# Altium PCB stm32f103c8t6.PcbDoc
Units mm, origin at the board's own origin, x right, y up, seen from the top; angles counter-clockwise.
Board outline 45 x 45 mm, 2 copper layers (Top Layer, Bottom Layer); 38 components, 26 nets, 183 pads, 48 vias.
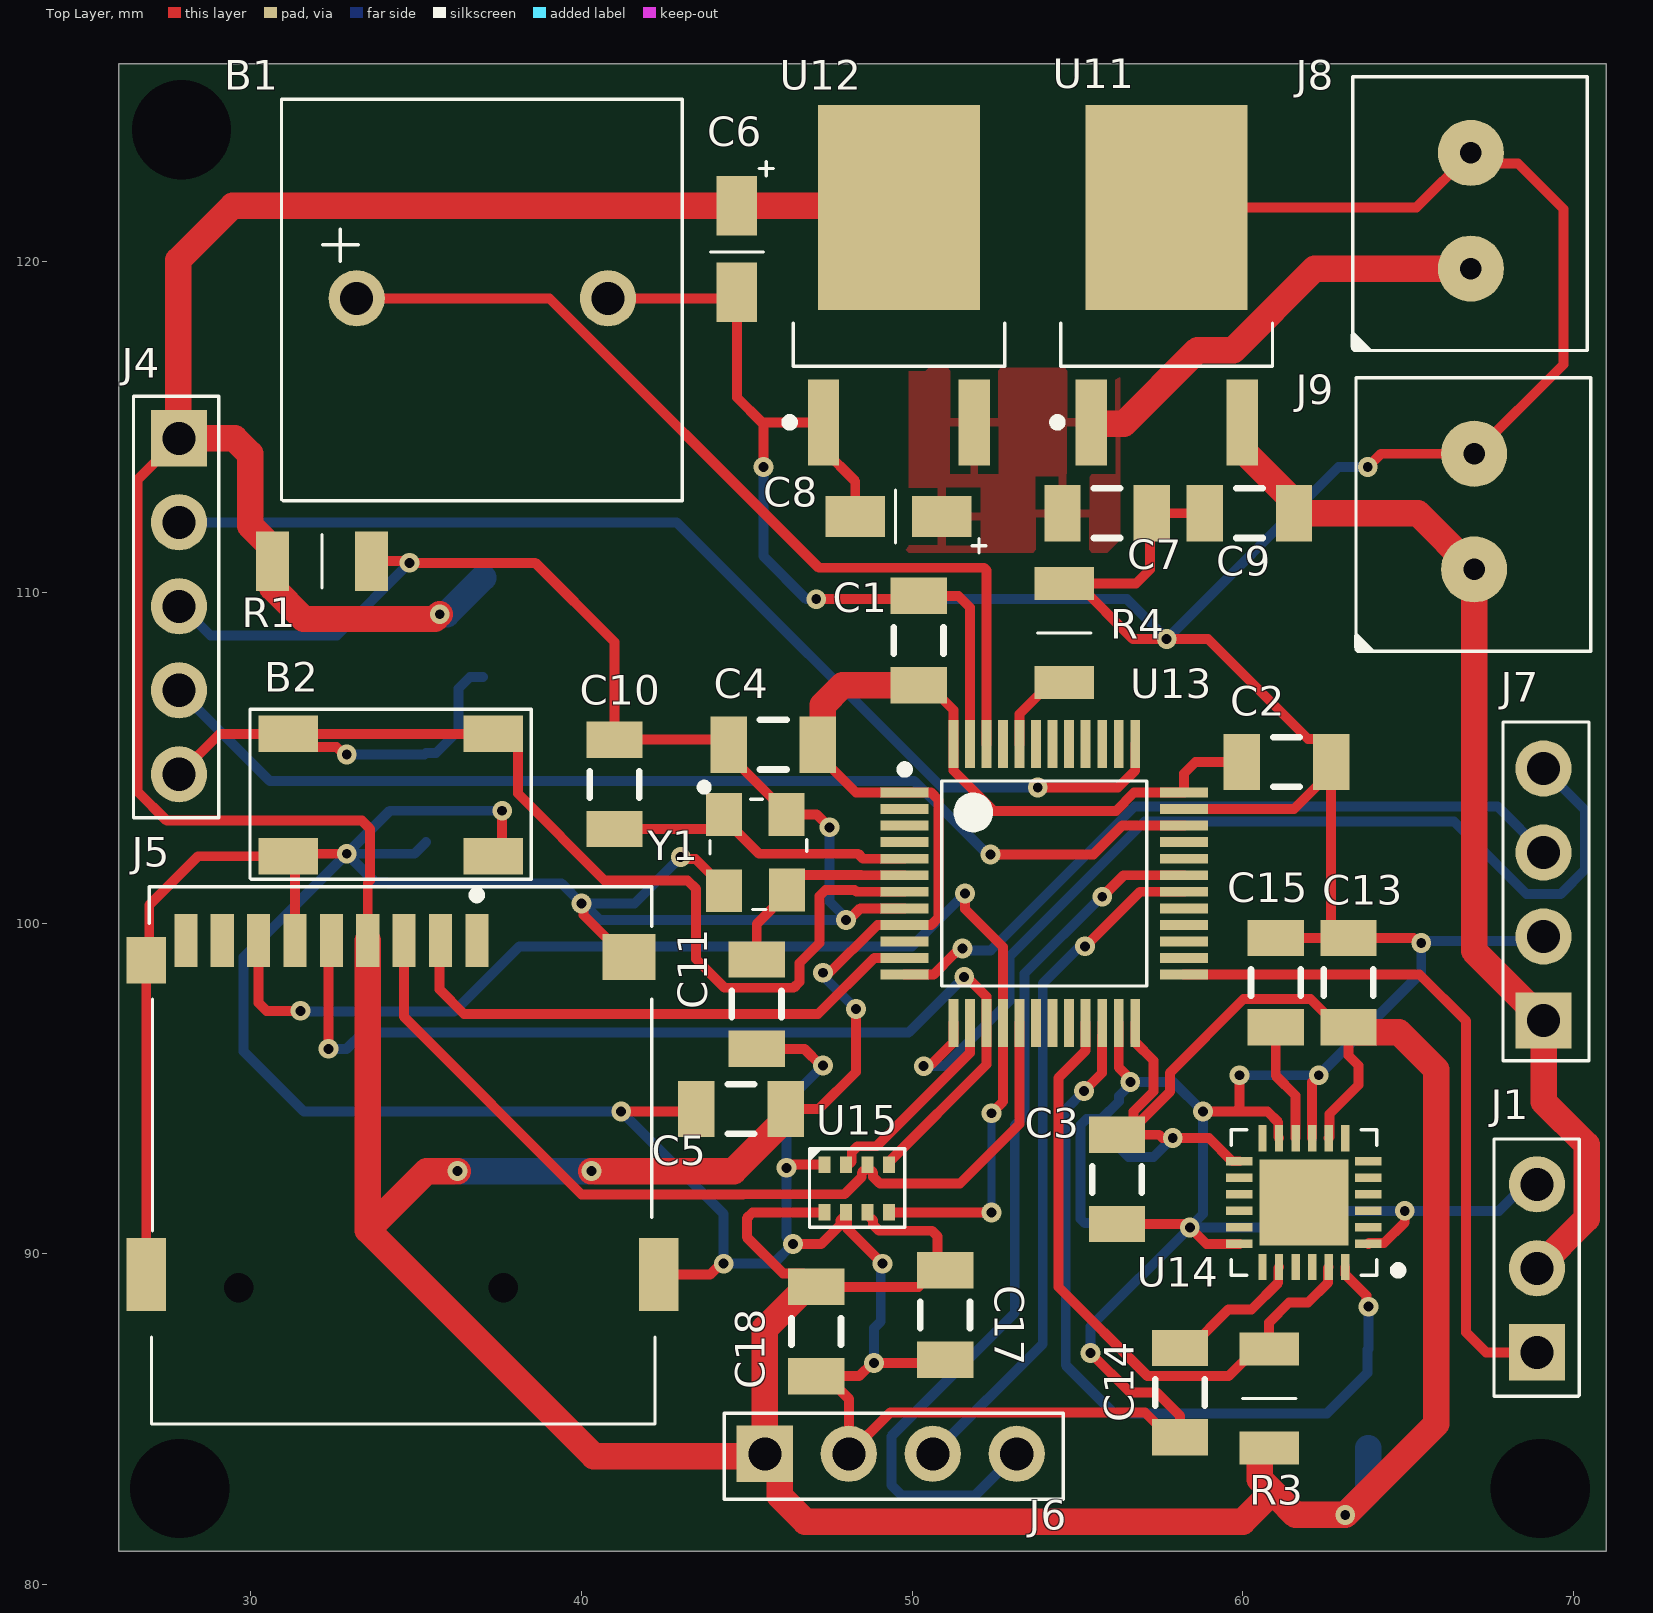
[diagram p0: Top Layer view]
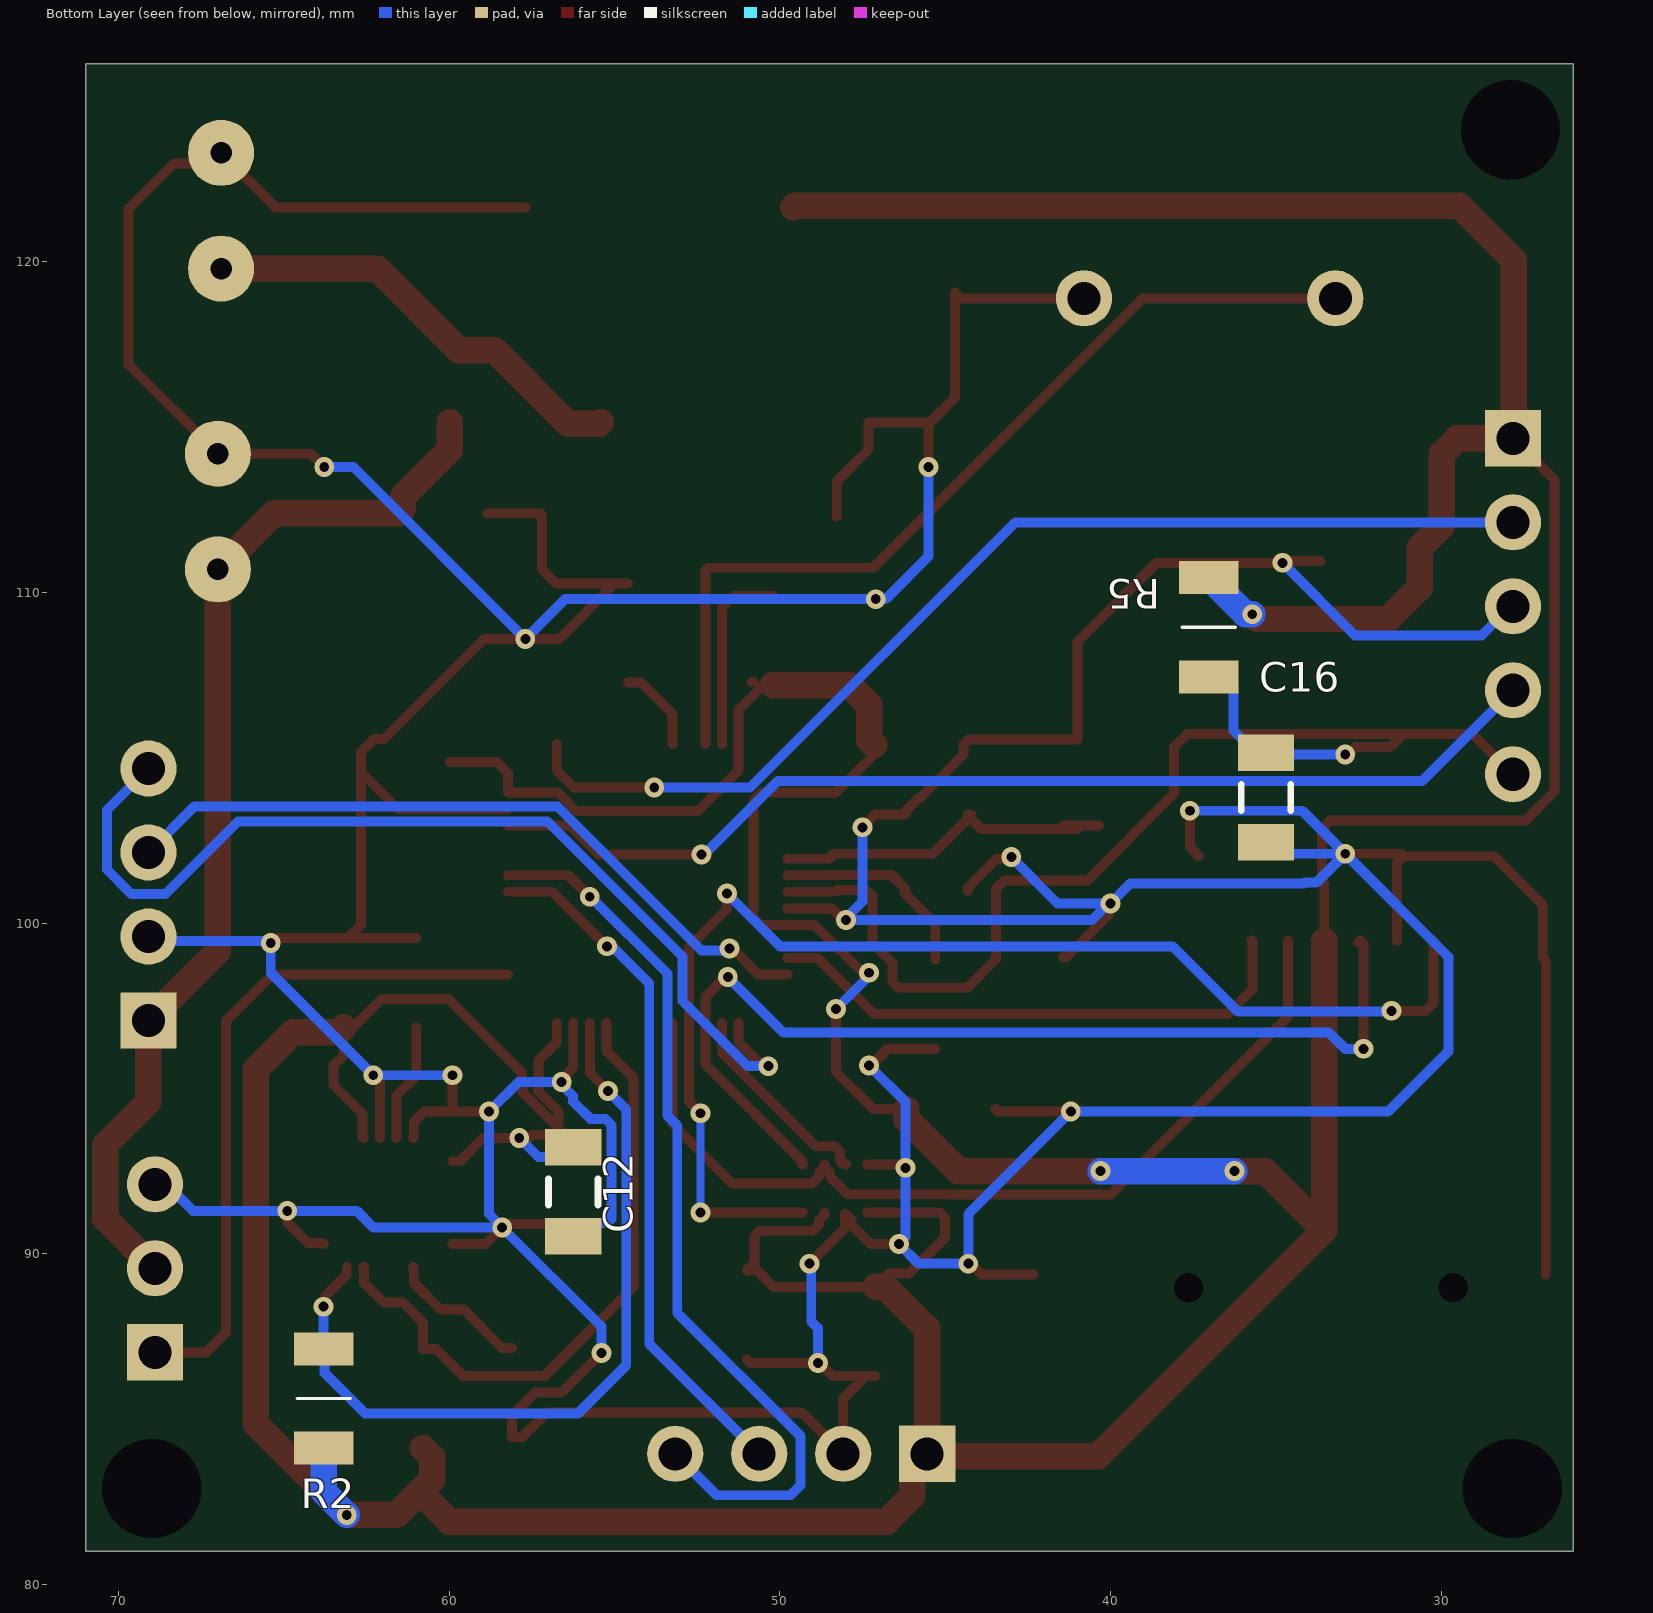
[diagram p1: Bottom Layer view, seen from below]
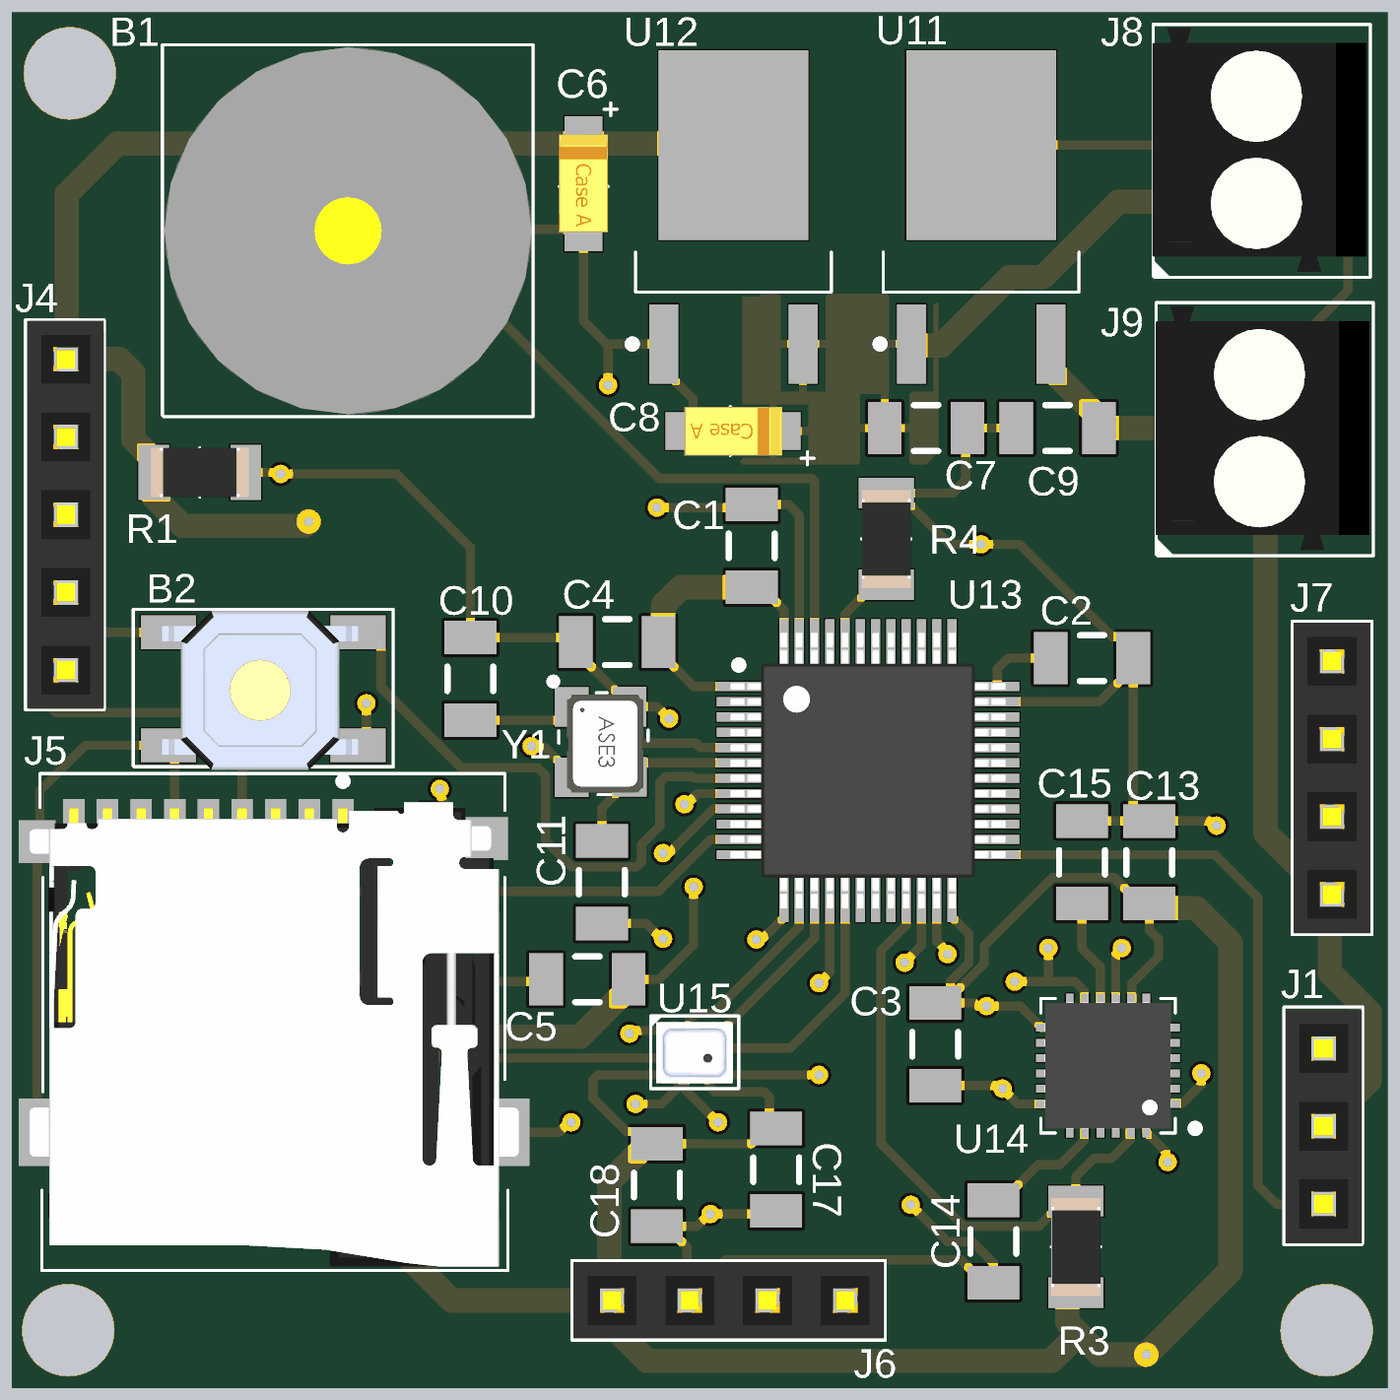
[diagram p2: 3D render of the assembled board from above, using the file's embedded part models]

## Layer stack, top to bottom
Top Solder: solder mask 0.0102, Solder Resist, Dk 3.5
Top Layer: signal copper 0.0356
Dielectric 1: dielectric 0.32, FR-4, Dk 4.8
Bottom Layer: signal copper 0.0356
Bottom Solder: solder mask 0.0102, Solder Resist, Dk 3.5

## Board outline
26,81 26,126 71,126 71,81

## Design rules (kind name [scope] priority, off if disabled: settings)
Clearance [All] p1: gap=0.254 ignorepadtopadclearanceinfootprint=FALSE except(0.152: Arc-Track Arc-SMDPad Arc-Poly Track-Track Track-SMDPad Track-Poly SMDPad-SMDPad SMDPad-THPad SMDPad-Poly THPad-Poly Via-Poly Fill-Poly Poly-Poly)
HoleSize [All] p1: absolutevalues=TRUE maxlimit=3.1 minlimit=0.025 maxpercent=80.000 minpercent=20.000
MinimumSolderMaskSliver [All] p1: minsoldermaskwidth=0.046
PolygonConnect [All] p1: connectstyle=Relief reliefconductorwidth=0.254 reliefentries=4 polygonreliefangle="90 Angle" airgapwidth=0.254
RoutingVias [All] p1: holewidth=0.3 width=0.6 viastyle="Through Hole" minholewidth=0.2 minwidth=0.2 maxholewidth=0.9 maxwidth=1.27
SilkToSolderMaskClearance [IsPad] p1: minsilkscreentomaskgap=0.1 clearancetoexposedcopper=TRUE
SolderMaskExpansion [All] p1: expansion=0.102
UnRoutedNet [All] p1: checkbadconnections=TRUE
Width [All] p1: maxlimit=1 minlimit=0.254 preferedwidth=0.3 minimp=50.000000 maximp=50.000000 favimp=50.000000
26 further rules are at their usual default settings.

## Classes and differential pairs
component class "STM32F PCB KARTI ЮEMATЭРЭ": B1 C2 C3 C4 C5 C6 C7 C8 C9 C10 C11 C12 C13 C14 C15 C16 C17 C18 J1 J4 J6 J7 J8 J9 R1 R2 R3 R4 R5 U11 U12 U13 U14 U15

## Components (designator, comment, footprint, x,y, rotation, side; value= is the part's Value field where it differs from the comment)
B1 "Buzzer 5v" "Buzzer 5v" 33.2,118.9 r0 top
B2 "Push Button" "PUSB BUTTON-SMD" 31.125,105.725 r0 top
C1 "0.1 uF C1206" C1206 50.2,108.55 r90 top
C2 "0.1 uF C1206" C1206 61.325,104.875 r0 top
C3 "0.1 uF C1206" C1206 56.2,92.25 r270 top
C4 "0.1 uF C1206" C1206 45.8,105.4 r180 top
C5 "0.1 uF C1206" C1206 44.825,94.375 r180 top
C6 "10 uF - Tantal" "C1206- TANTAL" 44.7,120.3 r270 top
C7 "330 nF C1206" C1206 55.9,112.4 r0 top
C8 "10 uF - Tantal" "C1206- TANTAL" 49.5,112.3 r180 top
C9 "0.1 uF C1206" C1206 60.2,112.4 r180 top
C10 "16 pF" C1206 41,104.2 r90 top
C11 "16 pF" C1206 45.3,97.55 r270 top
C12 "0.1 uF C1206" C1206 56.25,91.875 r270 bottom
C13 "0.1 uF C1206" C1206 63.2,98.2 r90 top
C14 "2.2 nF c1206" C1206 58.1,85.8 r270 top
C15 "0.1 uF C1206" C1206 61,98.2 r90 top
C16 "0.1 uF C1206" C1206 35.3,103.8 r270 bottom
C17 "0.1 uF C1206" C1206 51,88.15 r270 top
C18 "0.1 uF C1206" C1206 47.1,87.65 r270 top
J1 "Header 2.54 1x3" "Header 2.54 1x3" 68.875,87.02 r90 top
J4 "Header 2.54 1x5" "Header 2.54 1x5" 27.825,114.665 r270 top
J5 "Micro SD Card Holder" "Micro SD Card Holder" 34.15,92.4 r0 top
J6 "Header 2.54 1x4" "Header 2.54 1x4" 46.045,84.675 r0 top
J7 "Header 2.54 1x4" "Header 2.54 1x4" 68.375,97.56 r90 top
J8 "Klemens 1x2 3.5mm" "Klemens 1x2 - 3.5mm" 66.85,121.4 r90 top
J9 "Klemens 1x2 3.5mm" "Klemens 1x2 - 3.5mm" 66.95,112.3 r90 top
R1 "10K R1206" "R1206 Resэstor" 32.225,110.95 r180 top
R2 "4.7K R1206" "R1206 Resэstor" 63.8,85.7 r270 bottom
R3 "4.7K R1206" "R1206 Resэstor" 60.8,85.7 r270 top
R4 "10K R1206" "R1206 Resэstor" 54.6,108.7 r90 top
R5 "10K R1206" "R1206 Resэstor" 37.025,108.875 r90 bottom
U11 "L7805-DPAK" DPAK228P972X230-3N 57.7,119.3 r90 top
U12 "LD108633 DPAK" DPAK228P972X230-3N 49.6,119.3 r90 top
U13 "STM32F101" LQFP48-STM 54,101.2 r0 top
U14 "MPU6050" QFN50P400X400X90_HS-25N 61.85,91.55 r180 top
U15 "BMP280" BMP280 48.325,91.975 r0 top
Y1 "8 MHz 12.5 pf Osc" "8 MHZ Osc." 44.8,102.3 r270 top

## Footprints (in the part's own frame and the unit in brackets; to place one, negate y for a bottom-side part, rotate by r counter-clockwise, add the part's x,y. Pads: shape width x height; smd on the part's side, far side on the other; paste and mask are expansions set on the pad)
"8 MHZ Osc." [mm]
  rect 1.3x1.1 smd mask+0.05: 1(-0.981,-0.49) 2(1.319,-0.49) 3(1.303,1.417) 4(-0.986,1.401)
  silkscreen extent -1.91,-1.19 1.88,2.01, body extent -1.38,-0.64 1.82,1.86, height 1.22
BMP280 [mm]
  rect 0.35x0.5 smd mask+0.05: 1(-0.975,0.725) 2(-0.325,0.725) 3(0.325,0.725) 4(0.975,0.725) 5(0.975,-0.725) 6(0.325,-0.725) 7(-0.325,-0.725) 8(-0.975,-0.725)
  silkscreen extent -1.45,-1.17 1.45,1.2, body extent -1.24,-1 1.26,1, height 0.95
"Buzzer 5v" [mm]
  round 1.7 hole 1 mask+0.05: 1(0,0) 2(7.6,0)
  silkscreen extent -2.27,-6.12 9.85,6.02, body extent -2.2,-6.05 9.8,5.95, height 9.5
C1206 [mm] "Chip Capacitor, Body 3.2x1.6mm, IPC High Density"
  rect 1.1x1.7 smd: 1(-1.35,0) 2(1.35,0)
  silkscreen extent -0.4,-0.75 0.4,0.75, body extent -1.7,-0.9 1.7,0.9, height 1.3
"C1206- TANTAL" [mm]
  rect 1.8x1.23 smd mask+0.05: 1(-1.4,0) 1(-1.4,0) 2(1.22,0)
  silkscreen extent -2.74,-0.8 0,1.1, body extent -1.7,-0.8 1.5,0.8, height 1.62
DPAK228P972X230-3N [mm] "D-PAK, 3-Pads, Body 6,40x6,56mm (max), IPC Medium Density"
  rect 2.6x0.95 smd mask+0.05: 1(-4.15,2.28) 2(-4.15,-2.28)
  rect 6.2x4.9 smd mask+0.05: 3(2.35,0)
  silkscreen extent -4.27,-3.2 -1.15,3.43, body extent -2.5,-3.2 4.1,3.2, height 2.3
"Header 2.54 1x3" [mm]
  rect 1.7x1.7 hole 1 mask+0.05: 1(0,-0.025)
  round 1.7 hole 1 mask+0.05: 2(2.54,-0.025) 3(5.08,-0.025)
  silkscreen extent -1.33,-1.3 6.45,1.28, body extent -1.26,-1.27 6.36,1.23, height 9.1
"Header 2.54 1x4" [mm]
  rect 1.7x1.7 hole 1 mask+0.05: 1(-0.5,-0.725)
  round 1.7 hole 1 mask+0.05: 2(2.04,-0.725) 3(4.58,-0.725) 4(7.12,-0.725)
  silkscreen extent -1.73,-2.1 8.52,0.5, body extent -1.68,-2.05 8.48,0.45, height 9.1
"Header 2.54 1x5" [mm]
  rect 1.7x1.7 hole 1 mask+0.05: 1(0,0)
  round 1.7 hole 1 mask+0.05: 2(2.54,0) 3(5.08,0) 4(7.62,0) 5(10.16,0)
  silkscreen extent -1.28,-1.37 11.48,1.2, body extent -1.25,-1.3 11.45,1.2, height 9.1
"Klemens 1x2 - 3.5mm" [mm]
  round 2 hole 0.65: 1(-1.6,-0.05) 2(1.9,-0.05)
  silkscreen extent -4.11,-3.58 4.2,3.58, body extent -3.9,-3.45 4.09,3.55, height 8.9
LQFP48-STM [mm] "TSQFP, 48-Leads, Body 7,00x7,00mm, Pitch 0,50mm, IPC Medium Density"
  rect 1.45x0.3 smd mask+0.05: 1(-4.225,2.75) 2(-4.225,2.25) 3(-4.225,1.75) 4(-4.225,1.25) 5(-4.225,0.75) 6(-4.225,0.25) 7(-4.225,-0.25) 8(-4.225,-0.75) 9(-4.225,-1.25) 10(-4.225,-1.75) 11(-4.225,-2.25) 12(-4.225,-2.75) 25(4.225,-2.75) 26(4.225,-2.25) 27(4.225,-1.75) 28(4.225,-1.25) 29(4.225,-0.75) 30(4.225,-0.25) 31(4.225,0.25) 32(4.225,0.75) 33(4.225,1.25) 34(4.225,1.75) 35(4.225,2.25) 36(4.225,2.75)
  rect 0.3x1.45 smd mask+0.05: 13(-2.75,-4.225) 14(-2.25,-4.225) 15(-1.75,-4.225) 16(-1.25,-4.225) 17(-0.75,-4.225) 18(-0.25,-4.225) 19(0.25,-4.225) 20(0.75,-4.225) 21(1.25,-4.225) 22(1.75,-4.225) 23(2.25,-4.225) 24(2.75,-4.225) 37(2.75,4.225) 38(2.25,4.225) 39(1.75,4.225) 40(1.25,4.225) 41(0.75,4.225) 42(0.25,4.225) 43(-0.25,4.225) 44(-0.75,4.225) 45(-1.25,4.225) 46(-1.75,4.225) 47(-2.25,4.225) 48(-2.75,4.225)
  silkscreen extent -4.35,-3.1 3.1,3.57, body extent -4.5,-4.5 4.5,4.5, height 1.6
"Micro SD Card Holder" [mm]
  rect 0.7x1.6 smd paste+0 mask+0: 1(2.684,7.075) 2(1.584,7.075) 3(0.484,7.075) 4(-0.616,7.075) 5(-1.716,7.075) 6(-2.816,7.075) 7(-3.916,7.075) 8(-5.016,7.075) Cd(-6.116,7.075)
  rect 1.2x1.4 smd paste+0 mask+0: 10(-7.316,6.475)
  rect 1.6x1.4 smd paste+0 mask+0: 11(7.284,6.575)
  rect 1.2x2.2 smd paste+0 mask+0: 12(-7.316,-3.025) 13(8.184,-3.025)
  round 0 hole 0.9 unplated paste-1000 mask+0: ""(-4.516,-3.425) ""(3.484,-3.425)
  silkscreen extent -7.22,-7.55 8.08,8.7, body extent -7.57,-7.42 8.43,7.83, height 1.85
"PUSB BUTTON-SMD" [mm]
  rect 1.8x1.1 smd mask+0.05: 1(0,0) 2(6.2,0) 3(0,-3.7) 4(6.2,-3.7)
  silkscreen extent -1.15,-4.4 7.35,0.75, body extent -0.2,-4.5 6.2,0.7, height 1.5
QFN50P400X400X90_HS-25N [mm] "QFN, 24-Leads, Body 4,00x4,00mm, Pitch 0,50mm, Thermal Pad 2,70x2,60mm, IPC Medium Density"
  rect 0.8x0.25 smd mask+0.05: 1(-1.95,1.25) 2(-1.95,0.75) 3(-1.95,0.25) 4(-1.95,-0.25) 5(-1.95,-0.75) 6(-1.95,-1.25) 13(1.95,-1.25) 14(1.95,-0.75) 15(1.95,-0.25) 16(1.95,0.25) 17(1.95,0.75) 18(1.95,1.25)
  rect 0.25x0.8 smd mask+0.05: 7(-1.25,-1.95) 8(-0.75,-1.95) 9(-0.25,-1.95) 10(0.25,-1.95) 11(0.75,-1.95) 12(1.25,-1.95) 19(1.25,1.95) 20(0.75,1.95) 21(0.25,1.95) 22(-0.25,1.95) 23(-0.75,1.95) 24(-1.25,1.95)
  rect 2.7x2.6 smd mask+0.05: 25(0,0)
  silkscreen extent -2.98,-2.2 2.2,2.2, body extent -2.07,-2.07 2.07,2.07, height 0.9
"R1206 Resэstor" [mm]
  rect 1x1.8 smd mask+0.05: 1(-1.425,0) 2(1.575,0)
  silkscreen extent 0.08,-0.8 0.08,0.81, body extent -1.52,-0.8 1.68,0.81, height 0.55

## Part data
B2: "Smd Push Button", Satэn Alma Linki=https://urun.n11.com/diger/mini-pushbutton-switch-smd-P227461537?gclid=Cj0KCQjwkoDmBRCcARIsAG3xzl8Y_-jeD7HocNM6lvuZ_rVp83568XPGtNzlPwXWLph8oCRqo0yh87UaApZYEALw_wcB&gclsrc=aw.ds
U11: "L7805 5V REGULATOR. SMD PAKET"
U12: "LD1086 3.3V REGULATOR"
U13: "STM32F101 48 PЭNLЭ MЭKROЭЮLEMCЭ"
U14: "MPU6050 GYRO"
U15: "BMP280 SENSOR"

## Free pads (board coordinates)
  round 0 hole 3: ""(27.85,82.9) ""(27.9,124) ""(69,82.9)

## Via types
v1: diameter 0.6, hole 0.3, Top Layer to Bottom Layer, 48 vias

## Nets (pads, with @x,y where several pads share a name; then routed paths per layer and width w, separated by ;. In a path a pad name is that pad's centre, name@x,y a point inside that pad or via, vN(x,y) a via of type N, cw(c..) or ccw(c..) an arc to the next point about the centre after c; other vN are vias at no path point)
3.3V: C1.1 C2.1 C3.1 C4.1 C5.1 C6.1 C12.1 C13.1 C17.1 C18.1 J4.1 J5.4 J6.1 R1.2 R2.2 R3.2 R5.2 U12.3 U13.1 U13.9 U13.24 U13.36 U13.48 U14.8 U14.13 U15.6 U15.8 | length 221.3
  Top Layer w0.3: J4.1 26.571,113.411 26.571,103.986 27.457,103.1 33.358,103.1 33.604,102.854 33.604,101.293 33.534,101.223 J5.4 ; C5.1 47.175,94.375 48.3,95.5 v1(48.3,97.4) ; C4.1 47.15,105.1 48.3,103.95 U13.1 50.578,103.95 50.802,103.726 50.802,100.175 50.577,99.95 U13.9 48.95,99.95 47.4,98.4 v1(47.3,98.5) ; U15.8 45.176,91.25 45,91.074 45,90.5 46.1,89.4 46.7,89.4 C18.1 48.594,89 48.598,88.996 50.196,88.996 50.7,89.5 C17.1 50.774,89.726 50.774,90.522 50.598,90.698 49,90.698 48.823,90.875 48.823,91.002 48.65,91.175 U15.6 ; C1.1 50.5,107.2 51.15,106.55 51.25,106.45 U13.48 51.25,104.623 52.477,103.396 56.162,103.396 56.716,103.95 U13.36 58.225,104.525 58.575,104.875 C2.1 ; C1.1@50.8,107.3 C1.1@50.85,107.3 ; C3.1 C3.1@56.5,93.6 ; C3.1@56.696,94 56.696,94.3 57.304,94.908 57.304,95.846 56.75,96.4 U13.24 ; U14.13 59.675,92.8 58.975,93.5 v1(57.884,93.5) 57.569,93.5 57.469,93.6 C3.1@56.5,93.6 ; U14.8 62.625,93.525 62.625,94.229 63.504,95.108 63.504,95.692 63.2,95.996 C13.1 62.9,96.85 62.048,97.702 60.025,97.702 57.8,95.477 57.8,94.9 C3.1@56.5,93.6
  Top Layer w0.8: J5.4 33.534,90.716 ; v1(35.713,109.344) 35.569,109.2 31.6,109.2 30.65,110.15 R1.2 30.65,111.35 29.975,112.025 29.975,114.196 29.506,114.665 J4.1 27.8,114.69 27.8,120.05 29.45,121.7 44.7,121.7 49.55,121.7 U12.3 ; v1(36.25,92.5) 35.318,92.5 33.534,90.716 ; v1(40.3,92.5) 44.6,92.5 46.175,94.075 C5.1 ; C18.1 46.8,89 45.545,87.745 J6.1 ; C4.1 47.3,105.55 47.3,106.6 47.9,107.2 C1.1 ; R3.2 60.519,83.844 60.519,83.181 61.059,82.641 ; C13.1 63.35,96.7 64.725,96.7 65.854,95.571 65.854,84.854 v1(63.1,82.1) 61.6,82.1 61.059,82.641 ; 33.534,90.716 40.375,83.875 45.47,83.875 J6.1 ; J6.1 45.995,83.5 45.995,82.674 46.769,81.9 60,81.9 60.741,82.641 61.059,82.641
  Bottom Layer w0.3: v1(47.3,98.5) 47.3,98.4 v1(48.3,97.4) ; C12.1 56.55,92.925 57.299,92.925 57.874,93.5 v1(57.884,93.5)
  Bottom Layer w0.8: v1(35.713,109.344) 35.919,109.344 R5.2 ; v1(36.25,92.5) v1(40.3,92.5) ; v1(63.1,82.1) 63.8,82.8 R2.2
5V: C9.1 J1.2 J7.1 J9.1 U11.2 | length 32.7
  Top Layer w0.8: U11.2 59.98,114.325 61.4,112.905 61.4,112.55 C9.1 65.3,112.4 J9.1 67,99.16 J7.1 69.1,94.6 70.404,93.296 70.404,91.064 J1.2
7.4V: C7.1 C8.1 J8.1 U11.1 U12.2 | length 13.4
  Top Layer w0.8: U11.1 55.47,115.1 56.4,115.1 58.635,117.335 59.716,117.335 62.181,119.8 J8.1
GND: B1.2 B2.3 B2.4 C1.2 C2.2 C3.2 C4.2 C5.2 C6.2 C7.2 C8.2 C9.2 C10.2 C11.2 C12.2 C13.2 C14.2 C15.2 C16.2 C17.2 C18.2 J1.3 J4.3 J5.6 J5.10 J5.11 J5.12 J5.13 J6.2 J7.2 J8.2 J9.2 R1.1 R4.2 U11.3 U12.1 U13.8 U13.23 U13.35 U13.47 U14.1 U14.9 U14.11 U14.18 U15.1 U15.7 Y1.2 Y1.4 | length 313.9
  Top Layer w0.3: J5.12 J5.10 26.925,98.966 26.925,100.55 28.4,102.025 B2.3 ; J5.6 31.334,101.816 B2.3 ; v1(32.9,102.1) 31.2,102.1 B2.3 ; R1.1 34.75,110.95 v1(34.8,110.9) 38.6,110.9 41,108.5 C10.2 44.3,105.55 C4.2 44.45,105.1 45.764,103.786 45.801,103.786 46.201,103.386 Y1.4 47.114,103.286 v1(47.5,102.9) ; B2.4 37.6,102.3 v1(37.6,103.4) ; v1(40,100.6) 40.057,100.543 40.057,100.252 41.334,98.975 J5.11 ; B1.2 44.52,118.9 C6.2 44.7,115.9 45.45,115.15 ; v1(41.2,94.3) 43.4,94.3 C5.2 ; J5.13 43.894,89.375 44.219,89.7 v1(44.3,89.7) ; v1(43,102) 43.057,101.943 43.449,101.943 44.31,101.081 Y1.2 ; C11.2 46.739,96.2 47.239,95.7 v1(47.3,95.7) ; v1(45.5,113.8) 45.5,115.1 45.45,115.15 ; v1(46.2,92.6) 46.281,92.6 46.381,92.7 U15.1 ; v1(46.4,90.3) 47.252,90.3 47.827,90.875 47.827,91.002 U15.7@48.025,91.2 ; C18.2 C18.2@47.4,86.3 ; v1(47.1,109.8) 50.1,109.8 C1.2 51.4,109.9 51.75,109.55 U13.47 ; v1(48,100.1) 48.081,100.1 48.431,100.45 U13.8 ; U15.7@48.025,91.225 U15.7@48.025,91.2 ; C8.2 48.28,113.365 47.32,114.325 U12.1 45.45,115.15 ; v1(49.1,89.7) 48.025,90.775 U15.7@48.025,91.2 ; C17.2 50.9,86.7 v1(48.85,86.7) 48.8,86.7 48.4,86.3 C18.2@47.4,86.3 ; R4.2 R4.2@55,110.275 ; v1(55.4,87) 56.6,85.8 57.4,85.8 58.1,85.1 C14.2 57.8,84.45 57.046,85.204 49.339,85.204 J6.2 48.085,85.615 C18.2@47.4,86.3 ; C3.2 58.219,90.9 58.319,90.8 v1(58.4,90.8) 58.9,90.3 U14.18 ; U13.23 56.25,95.631 56.6,95.281 v1(56.6,95.2) ; U11.3 65.25,121.65 J8.2 67.225,122.975 68.325,122.975 69.7,121.6 69.7,116.9 J9.2 64.181,114.2 v1(63.781,113.8) ; U13.35 61.55,103.45 C2.2@62.675,104.575 ; v1(58.8,94.3) 59.776,94.3 ; C9.2 C7.2 57.2,112.35 57.2,110.7 56.775,110.275 R4.2@55,110.275 ; v1(59.9,95.4) 59.9,94.424 59.776,94.3 ; C15.2 C13.2@63.075,99.55 ; U14.11 61.075,93.525 61.075,93.977 60.752,94.3 59.776,94.3 ; U14.9 62.1,95.2 v1(62.3,95.4) ; U14.1 63.825,90.325 64.277,90.325 64.9,90.948 v1(64.9,91.3) ; v1(65.4,99.4) 65.319,99.4 65.169,99.55 C13.2 C13.2@63.075,99.55 ; R4.2@55,110.275 56.675,108.6 v1(57.7,108.6) 58.95,108.6 61.975,105.575 62.275,105.575 62.675,105.175 C2.2 C2.2@62.675,104.575 ; C2.2@62.675,104.575 62.675,99.95 C13.2@63.075,99.55
  Bottom Layer w0.3: J4.3 27.893,109.585 28.778,108.7 32.6,108.7 v1(34.8,110.9) ; C16.2 34.95,102.1 v1(32.9,102.1) ; v1(37.6,103.4) 34.2,103.4 v1(32.9,102.1) ; v1(43,102) 41.6,100.6 v1@40.061,100.6 ; v1(45.5,113.8) 45.5,111.1 46.8,109.8 v1(47.1,109.8) 56.5,109.8 v1(57.7,108.6) 62.9,113.8 v1(63.781,113.8) ; v1(47.3,95.7) 46.2,94.6 v1(46.2,92.6) 46.2,90.5 v1(46.4,90.3) 45.8,89.7 v1(44.3,89.7) 44.3,91.2 v1(41.2,94.3) 31.6,94.3 29.776,96.124 29.776,98.976 v1(32.9,102.1) ; v1(47.5,102.9) 47.5,100.661 48,100.161 v1(48,100.1) 40.561,100.1 v1@40.061,100.6 ; v1(48.85,86.7) 48.85,87.75 49.05,87.95 49.05,89.65 v1(49.1,89.7) ; v1(55.4,87) 55.4,87.8 v1(58.4,90.8) ; C12.2 55.85,90.925 55.227,90.925 55.098,91.054 55.098,93.9 55.275,94.077 55.723,94.077 56.254,94.608 56.254,94.773 56.6,95.119 v1(56.6,95.2) 57.9,95.2 v1(58.8,94.3) 58.8,91.2 v1(58.4,90.8) ; v1(59.9,95.4) v1(62.3,95.4) 65.4,98.5 v1(65.4,99.4) 65.457,99.457 68.957,99.457 J7.2 ; J1.3 68.547,92.1 67.747,91.3 v1(64.9,91.3) 62.8,91.3 62.3,90.8 v1(58.4,90.8) ; v1(32.9,102.1) 33.775,101.225 34.125,101.225 34.15,101.2 39.4,101.2 v1(40,100.6) v1@40.061,100.6
NetB1_1: B1.1 U13.46 | length 27.7
  Top Layer w0.3: B1.1 39.027,118.9 47.175,110.752 52.172,110.752 52.25,110.674 U13.46
NetC10_1: C10.1 U13.5 Y1.1 | length 10.7
  Top Layer w0.3: C10.1@40.35,102.95 C10.1@41.4,102.95 ; C10.1 43.91,102.85 Y1.1@44.266,103.205 ; Y1.1@44.2,103.271 44.25,103.221 Y1.1@44.266,103.205 ; Y1.1 44.31,103.25 Y1.1@44.266,103.205 ; U13.5 48.519,101.95 48.369,102.1 45.371,102.1 Y1.1@44.266,103.205
NetC11_1: C11.1 U13.6 Y1.3 | length 6.3
  Top Layer w0.3: C11.1 45.3,99.979 46.217,100.897 Y1.3 46.217,101.052 46.617,101.452 48.45,101.452 48.452,101.45 U13.6
NetC14_1: C14.1 U14.20 | length 4.3
  Top Layer w0.3: C14.1 58.4,87.15 59.562,88.312 60.265,88.312 61.075,89.123 61.075,89.575 U14.20
NetC15_1: C15.1 U14.10 | length 3.6
  Top Layer w0.3: C15.1 61,95.388 61.6,94.788 U14.10
NetJ1_1: J1.1 U13.25 | length 20.9
  Top Layer w0.3: U13.25 65.35,98.45 66.75,97.05 66.75,87.625 67.355,87.02 J1.1
NetJ4_2: J4.2 U13.37 | length 33.3
  Top Layer w0.3: v1(53.8,104.1) 56.227,104.1 56.75,104.623 U13.37
  Bottom Layer w0.3: J4.2 42.875,112.125 50.9,104.1 v1(53.8,104.1)
NetJ4_4: J4.4 U13.34 | length 32.8
  Top Layer w0.3: v1(52.375,102.075) 55.481,102.075 56.356,102.95 U13.34
  Bottom Layer w0.3: J4.4 30.572,104.298 50.063,104.298 52.286,102.075 v1(52.375,102.075)
NetJ5_2: J5.2 U13.11 | length 16.6
  Top Layer w0.3: J5.2 35.7,99.441 35.7,98 36.45,97.25 47.154,97.25 48.854,98.95 U13.11
NetJ5_3: J5.3 U13.17 U15.3 | length 27.7
  Top Layer w0.3: J5.3 34.625,99.466 34.625,97.175 40.004,91.796 44.889,91.796 44.895,91.802 47.954,91.802 48.477,92.325 48.477,92.452 U15.3@48.65,92.625 ; U15.3 U15.3@48.65,92.625 ; U13.17 53.25,93.925 51.45,92.125 49.023,92.125 48.823,92.325 48.823,92.452 U15.3@48.65,92.625
NetJ5_5: J5.5 U13.15 U15.4 | length 30.8
  Top Layer w0.3: v1(32.35,96.2) 32.35,99.391 J5.5 J5.5@32.5,99.409 ; U15.4 49.325,92.725 49.325,92.8 52.25,95.725 U13.15 52.25,97.777 51.652,98.375 v1(51.575,98.375)
  Bottom Layer w0.3: v1(32.35,96.2) 32.9,96.2 33.396,96.696 49.896,96.696 v1(51.575,98.375)
NetJ5_7: J5.7 U13.16 U15.5 | length 38.2
  Top Layer w0.3: J5.7 30.234,97.592 30.476,97.35 v1(31.5,97.35) ; U15.5 v1(52.4,91.25) ; v1(51.6,100.9) 51.6,100.425 52.75,99.275 U13.16 52.75,94.6 v1(52.4,94.25)
  Bottom Layer w0.254: v1(52.4,91.25) v1(52.4,94.25)
  Bottom Layer w0.3: v1(31.5,97.35) 31.525,97.325 36.15,97.325 38.125,99.3 50,99.3 v1(51.6,100.9)
NetJ6_3: J6.3 U13.30 | length 21
  Top Layer w0.3: v1(55.225,99.3) 55.246,99.3 56.896,100.95 U13.30
  Bottom Layer w0.3: J6.3 53.95,87.275 53.95,98.175 55.018,99.243 55.168,99.243 v1(55.225,99.3)
NetJ6_4: J6.4 U13.31 | length 27.6
  Top Layer w0.3: v1(55.75,100.8) 56.4,101.45 U13.31
  Bottom Layer w0.3: J6.4 51.911,82.696 49.679,82.696 49.371,83.004 49.371,84.48 53.104,88.213 53.104,93.878 53.402,94.176 53.402,98.475 55.727,100.8 v1(55.75,100.8)
NetJ7_3: J7.3 U13.12 | length 22.1
  Top Layer w0.3: U13.12 50.654,98.45 51.283,99.079 51.295,99.079 51.446,99.23 v1(51.528,99.23)
  Bottom Layer w0.3: v1(51.528,99.23) 51.585,99.172 52.378,99.172 52.375,99.175 56.725,103.525 67.715,103.525 J7.3
NetJ7_4: J7.4 U13.13 | length 30.4
  Top Layer w0.3: v1(50.35,95.675) 50.407,95.732 50.582,95.732 51.25,96.4 U13.13
  Bottom Layer w0.3: v1(50.35,95.675) 50.975,95.675 52.95,97.65 52.95,98.996 57.027,103.073 66.394,103.073 68.581,100.886 69.619,100.886 70.354,101.621 70.354,103.426 J7.4
NetR2_1: R2.1 U13.22 U14.24 | length 24.5
  Top Layer w0.3: v1(55.2,94.921) 55.748,95.469 55.748,96.612 55.75,96.614 U13.22 ; U14.24 63.1,89.375 63.743,88.732 63.743,88.457 v1(63.8,88.4)
  Bottom Layer w0.3: v1(55.2,94.921) 54.646,94.367 54.646,86.63 56.101,85.175 62.55,85.175 63.775,86.4 63.775,87.1 R2.1 v1(63.8,88.4)
NetR3_1: R3.1 U13.21 U14.23 | length 19.7
  Top Layer w0.3: U13.21 55.25,96.15 54.425,95.325 54.425,88.998 57.125,86.298 59.573,86.298 60.4,87.125 R3.1 60.8,87.925 61.399,88.524 61.976,88.524 62.575,89.123 62.575,89.575 U14.23
NetR4_1: R4.1 U13.44 | length 2.6
  Top Layer w0.3: U13.44 53.25,106.325 54.2,107.275 R4.1
NetU13_5: 
NetU13_14: U13.14 U15.2 | length 6.2
  Top Layer w0.3: U15.2 48.025,92.725 48.111,92.725 48.173,92.787 48.173,93.075 48.35,93.252 48.923,93.252 51.75,96.079 U13.14
NRST: B2.1 B2.2 C16.1 J4.5 R5.1 U13.7 | length 38
  Top Layer w0.3: J4.5 29.045,105.725 B2.1 ; v1(32.9,105.1) 32.819,105.1 32.594,105.325 31.525,105.325 B2.1 ; U13.7 48.313,100.95 48.263,101 47.376,101 47.2,100.824 47.2,99.396 46.596,98.791 46.596,98.224 46.42,98.048 44.325,98.048 43.458,98.915 43.458,101.042 43.204,101.296 40.7,101.296 38.075,103.921 38.075,105.325 37.675,105.725 B2.2 B2.1
  Bottom Layer w0.3: v1(32.9,105.1) 35.25,105.1 C16.1 35.6,105.15 36.275,105.825 36.275,107.1 36.625,107.45 R5.1
pads on no net: J5. J5.1 J5.8 J5.Cd U13.2 U13.3 U13.4 U13.10 U13.18 U13.19 U13.20 U13.26 U13.27 U13.28 U13.29 U13.32 U13.33 U13.38 U13.39 U13.40 U13.41 U13.42 U13.43 U13.45 U14.2 U14.3 U14.4 U14.5 U14.6 U14.7 U14.12 U14.14 U14.15 U14.16 U14.17 U14.19 U14.21 U14.22 U14.25

## Polygon pours and split planes (outlines as drawn)
no net on Top Layer "NONET_L01_P022" (solid, pour order 22): 26.041,125.958
7.4V on Top Layer "7.4V_L01_P018" (solid, pour order 18): 50.5,116.8 56.1,116.8 56.3,116.6 56.3,111.6 55.9,111.2 49.9,111.2 49.8,111.3 49.9,111.4 49.9,116.7 50.4,116.7
no net on Top Layer "Top Layer-No Net" (solid, pour order 12): 53.725,114.95
no net on Top Layer "Top Layer-No Net 1" (solid, pour order 10): 53.725,114.95
no net on Top Layer "Top Layer-No Net 2" (solid, pour order 6): 50.575,115.75
no net on Top Layer "Top Layer-No Net 3" (solid, pour order 4): 50.225,116.7
no net on Bottom Layer "NONET_L02_P026" (solid, pour order 26): 26.041,125.958
no net on Bottom Layer "NONET_L02_P024" (solid, pour order 24): 26,125.883

## Other copper
Top Layer:
  pour cut-out: 30.25,124.25
  pour cut-out: 28.75,123.5
  pour cut-out: 25,121

## Silkscreen, mask and mechanical layers (free items; w line width, h text height)
Mechanical 13:
  lines w0.1: 59.5,81 26,81 ; 71,92.5 71,126 ; 26,81 26,126 71,126 ; 26,81 71,81 71,126